# EAGLE board FinalEle2_project v35 (EAGLE 9.7.0)
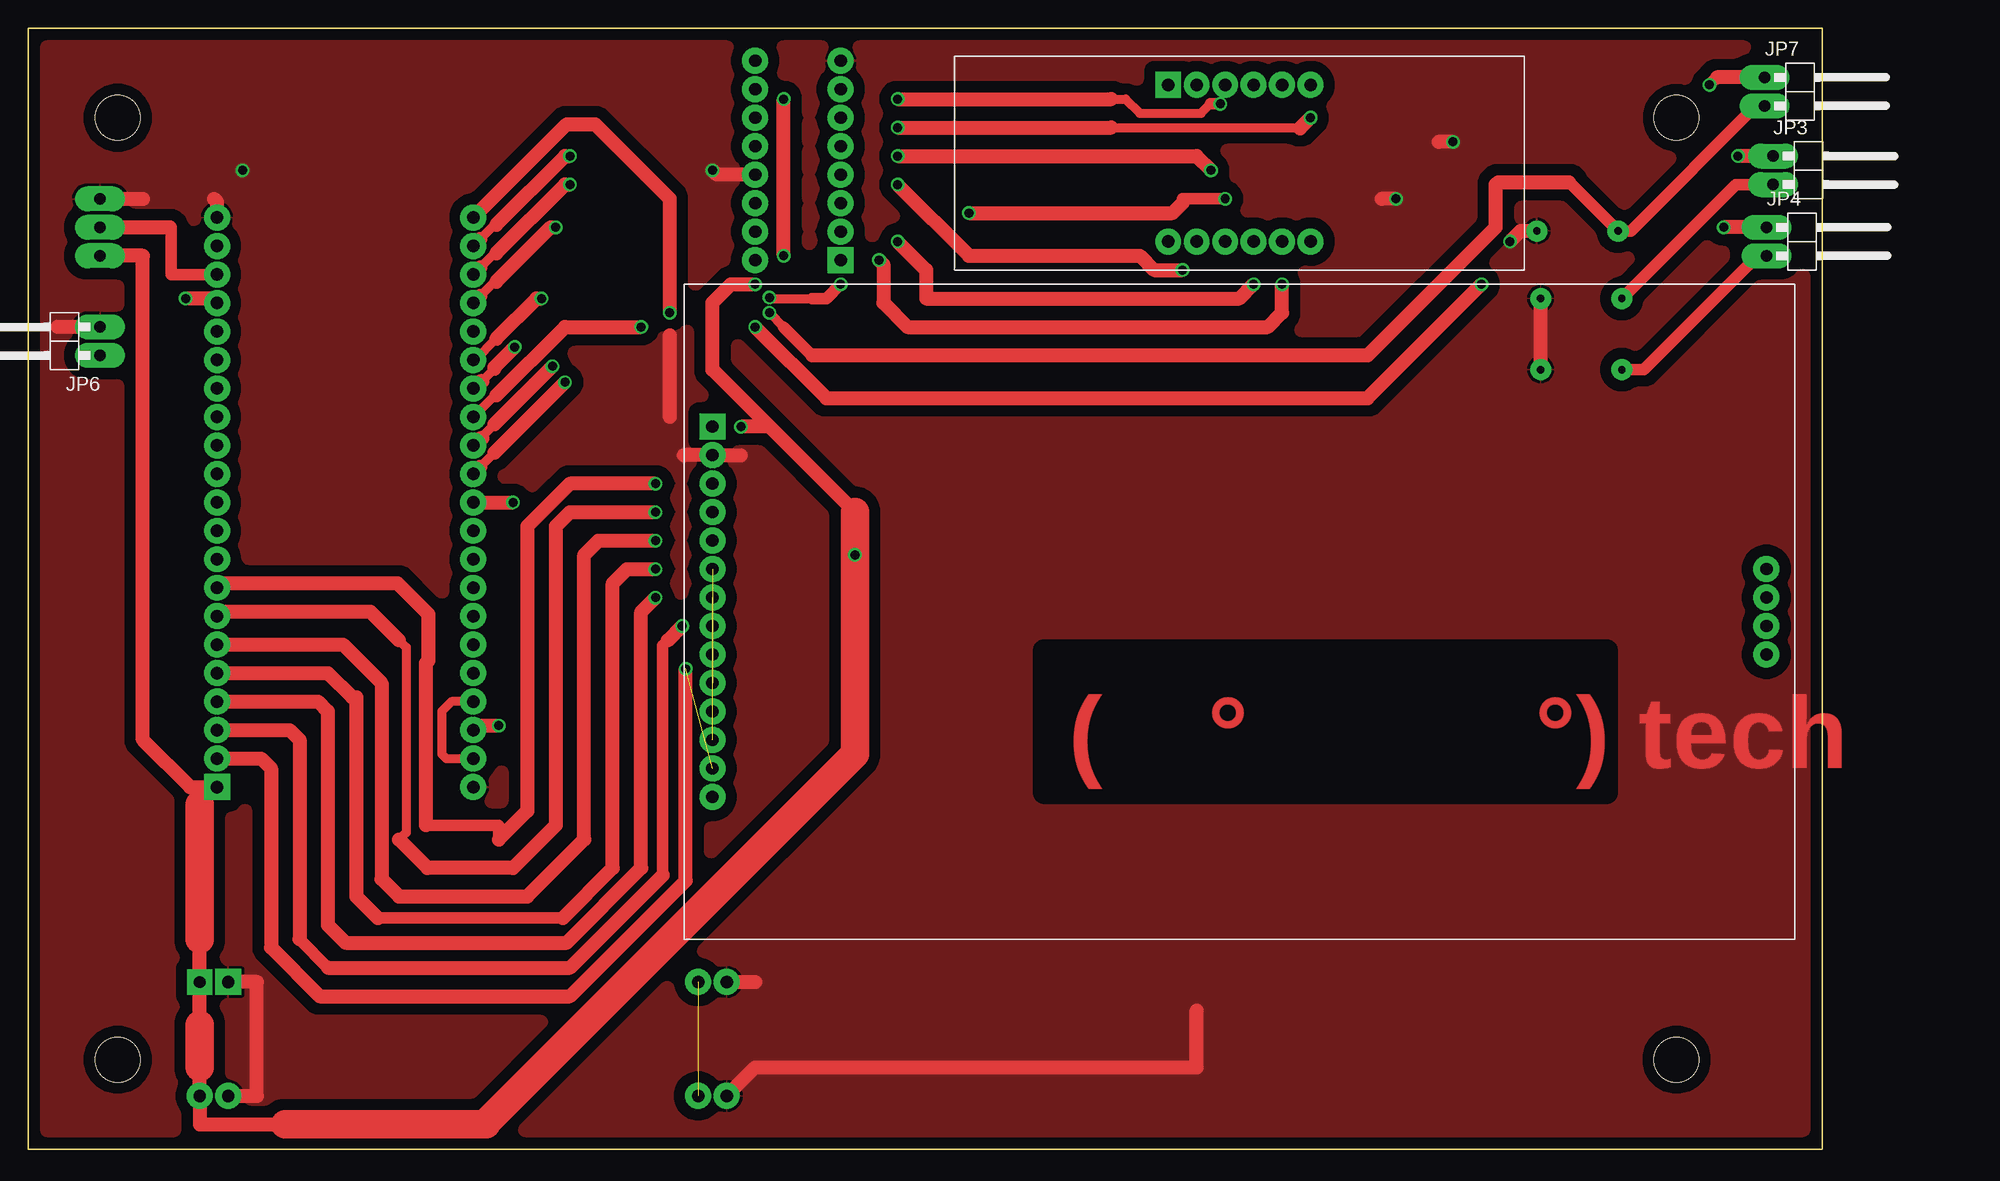
[diagram p0: board, top side]
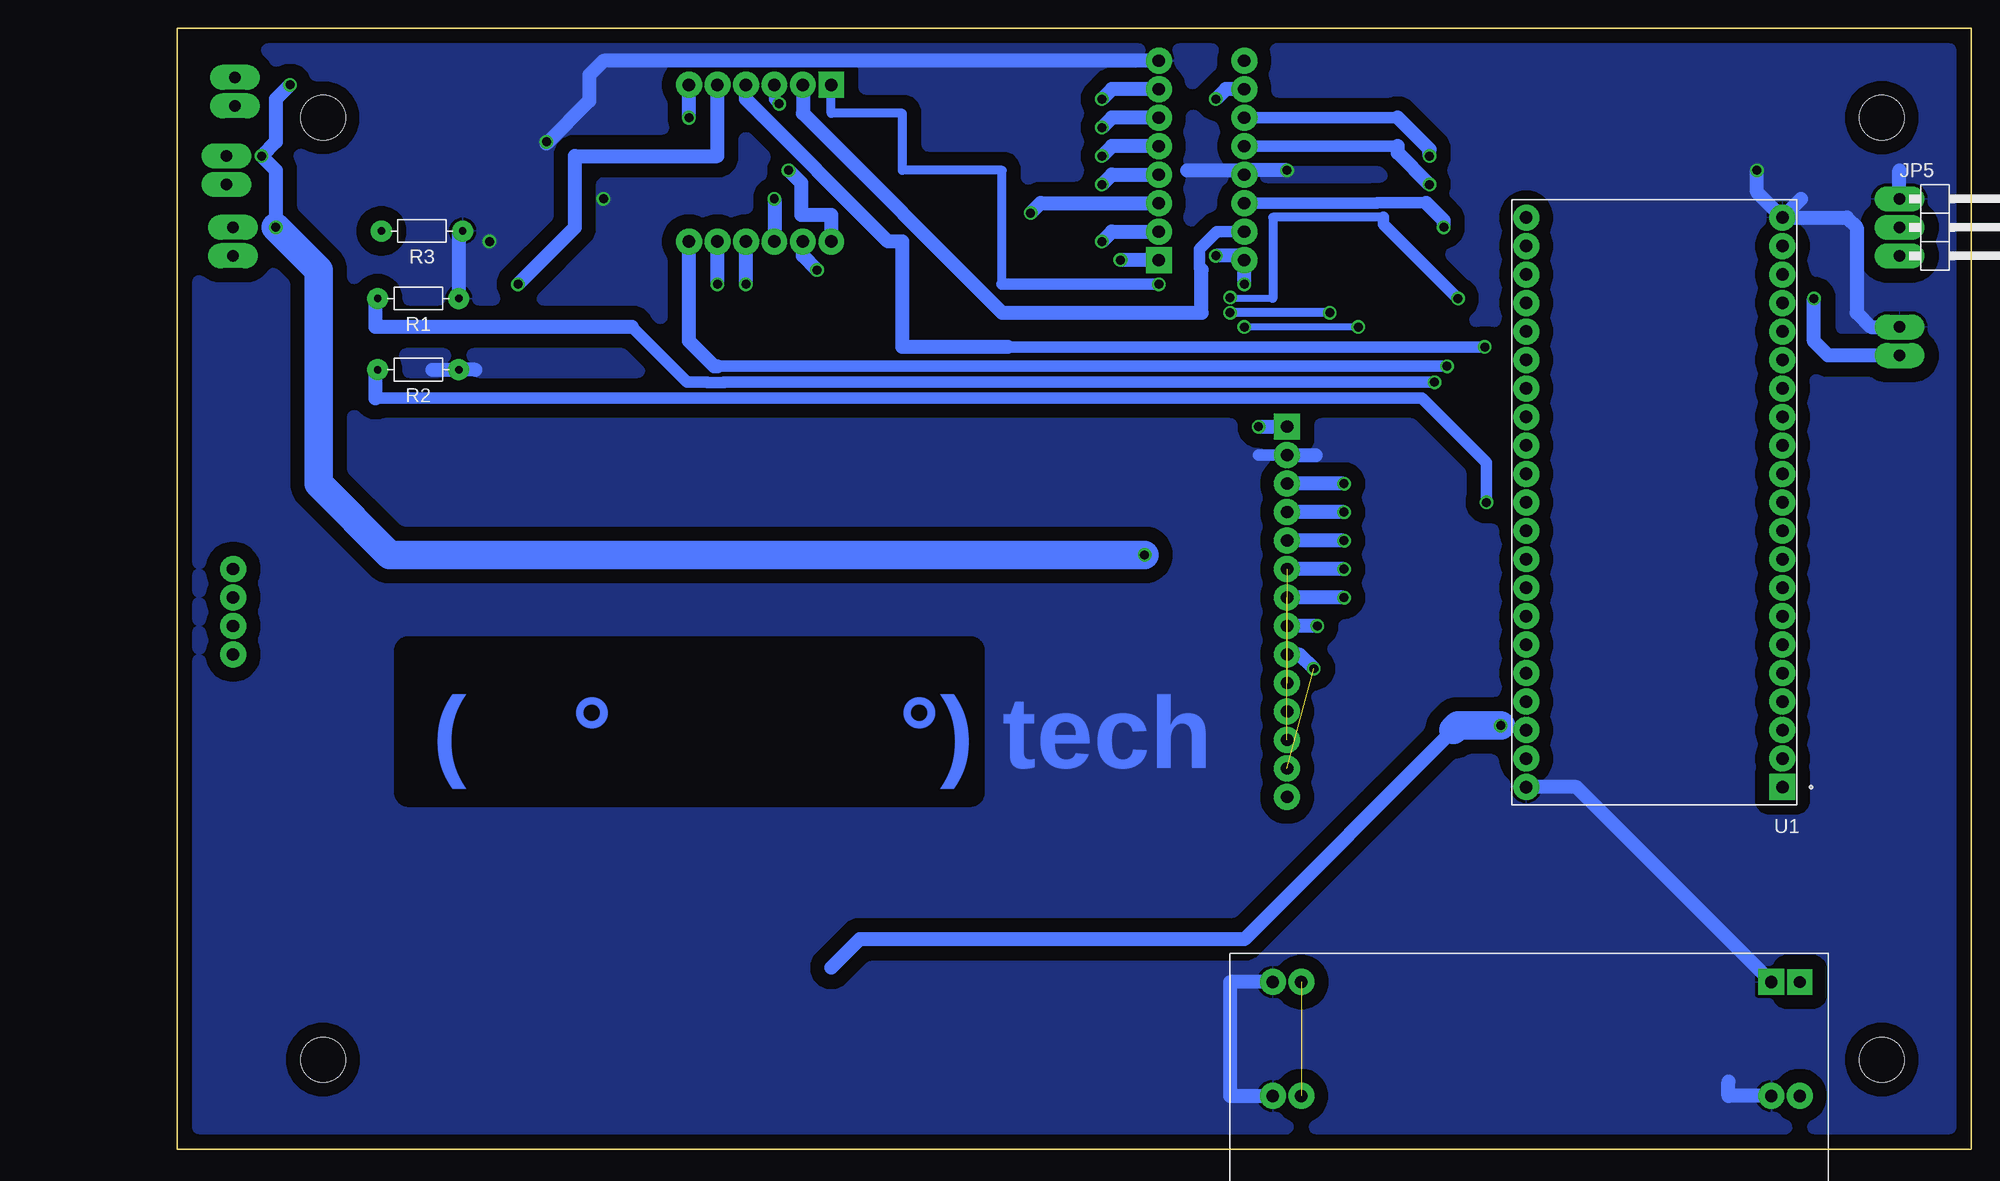
[diagram p1: board, bottom side, seen from below]

Size 160 x 100 mm. Coordinates in mm from the lower left corner, seen from the top.
Outline: 160,0 160,100 0,100 0,0 160,0
Copper layers (1*16): Top / Bottom
Stack-up Default Layer Stack: Top User Defined 0.035mm / Dielectric-1 User Defined 1.5mm / Bottom User Defined 0.035mm
Design rules: minimum copper width 6mil, minimum drill size 0.8mm, copper clearance wire_polygon to wire_polygon 0.3mm, copper clearance wire_polygon to pad_smd 6mil, copper clearance wire_polygon to via 6mil, copper clearance pad_smd to pad_smd 6mil, copper clearance pad_smd to via 6mil, copper clearance via to via 6mil, copper clearance smd to pad (same net) 6mil, copper clearance smd to via (same net) 6mil, copper clearance smd to smd (same net) 6mil, dimension clearance 0mil, via restrict clearance 0mil, restrict clearance 0mil, drill distance 6mil, keepout clearance 0mil
Holes 4 mm at 147,8 147,92 8,92 8,8

## Footprints (pad centres in the part's own frame; a part is rotated, then mirrored left to right if it is on the bottom)
1X02/90 = drill 1.016 long: 1 -1.27,-3.81; 2 1.27,-3.81
1X03/90 = drill 1.016 long: 1 -2.54,-3.81; 2 0,-3.81; 3 2.54,-3.81
RESAD724W46L381D178B = drill 0.66 pad 1.26: 1 -3.62,0; 2 3.62,0
XCVR_ESP32-S2-DEVKITM-1U = drill 1.1 square: J1_1 -11.43,25.4 | drill 1.1: J1_2 -11.43,22.86; J1_3 -11.43,20.32; J1_4 -11.43,17.78; J1_5 -11.43,15.24; J1_6 -11.43,12.7; J1_7 -11.43,10.16; J1_8 -11.43,7.62; J1_9 -11.43,5.08; J1_10 -11.43,2.54; J1_11 -11.43,0; J1_12 -11.43,-2.54; J1_13 -11.43,-5.08; J1_14 -11.43,-7.62; J1_15 -11.43,-10.16; J1_16 -11.43,-12.7; J1_17 -11.43,-15.24; J1_18 -11.43,-17.78; J1_19 -11.43,-20.32; J1_20 -11.43,-22.86; J1_21 -11.43,-25.4; J3_1 11.43,25.4; J3_2 11.43,22.86; J3_3 11.43,20.32; J3_4 11.43,17.78; J3_5 11.43,15.24; J3_6 11.43,12.7; J3_7 11.43,10.16; J3_8 11.43,7.62; J3_9 11.43,5.08; J3_10 11.43,2.54; J3_11 11.43,0; J3_12 11.43,-2.54; J3_13 11.43,-5.08; J3_14 11.43,-7.62; J3_15 11.43,-10.16; J3_16 11.43,-12.7; J3_17 11.43,-15.24; J3_18 11.43,-17.78; J3_19 11.43,-20.32; J3_20 11.43,-22.86; J3_21 11.43,-25.4
3.5TFT = drill 1.1 square: P$1 -10.16,16.51 | drill 1.1: P$2 -10.16,13.97; P$3 -10.16,11.43; P$4 -10.16,8.89; P$5 -10.16,6.35; P$6 -10.16,3.81; P$7 -10.16,1.27; P$8 -10.16,-1.27; P$9 -10.16,-3.81; P$10 -10.16,-6.35; P$11 -10.16,-8.89; P$12 -10.16,-11.43; P$13 -10.16,-13.97; P$14 -10.16,-16.51; P$15 83.82,3.81; P$16 83.82,1.27; P$17 83.82,-1.27; P$18 83.82,-3.81
POWERSUPPLYMODULE = drill 1.1: P$1 -24.13,-1.27; P$2 -21.59,-1.27; P$5 20.32,-1.27; P$6 22.86,-1.27; P$8 20.32,-11.43; P$9 22.86,-11.43 | drill 1.05 square: P$3 -24.13,-11.43 | drill 1.1 square: P$4 -21.59,-11.43
7S-4D = drill 1.1 square: P$1 -6.35,6.35 | drill 1.1: P$2 -3.81,6.35; P$3 -1.27,6.35; P$4 1.27,6.35; P$5 3.81,6.35; P$6 6.35,6.35; P$7 -6.35,-7.62; P$8 -3.81,-7.62; P$9 -1.27,-7.62; P$10 1.27,-7.62; P$11 3.81,-7.62; P$12 6.35,-7.62
74HC595N = drill 1.1 square: P$1 -3.81,8.89 | drill 1.1: P$2 -3.81,6.35; P$3 -3.81,3.81; P$4 -3.81,1.27; P$5 -3.81,-1.27; P$6 -3.81,-3.81; P$7 -3.81,-6.35; P$8 -3.81,-8.89; P$9 3.81,8.89; P$10 3.81,6.35; P$11 3.81,3.81; P$12 3.81,1.27; P$13 3.81,-1.27; P$14 3.81,-3.81; P$15 3.81,-6.35; P$16 3.81,-8.89

## Placement (x,y rotation side)
JP3  PINHD-1X2/90  [1X02/90]  159.42,87.31 270 top
JP4  PINHD-1X2/90  [1X02/90]  158.82,80.96 270 top
JP5  PINHD-1X3/90  [1X03/90]  2.62,82.23 270 bottom
JP6  PINHD-1X2/90  [1X02/90]  2.61,72.07 90 top
JP7  PINHD-1X2/90  [1X02/90]  158.65,94.34 270 top
R1  1k  [RESAD724W46L381D178B]  138.5,75.88 180 bottom
R2  1k  [RESAD724W46L381D178B]  138.5,69.53 180 bottom
R3  1k  [RESAD724W46L381D178B]  138.17,81.9 180 bottom
U1  ESP32-S2-DEVKITM-1U  [XCVR_ESP32-S2-DEVKITM-1U]  28.28,57.7 180 bottom
U$1  3.5TFTWQ  [3.5TFT]  71.19,47.94 0 top
U$2  POWERSUPPLYMODULE  [POWERSUPPLYMODULE]  39.44,3.49 180 bottom
U$4  7S-4D  [7S-4D]  108.02,88.58 0 top
U$7  OIK74HC595N  [74HC595N]  68.65,88.19 180 top

## Library data of the parts
JP3 JP4 JP6 JP7 = Connector; CATEGORY: Headers; DESCRIPTION: Header, Right Angle, 2 Position; MANUFACTURER: Generic; MPN: Generic; OPERATING_TEMPERATURE: Generic; PART_STATUS: Active; PITCH: 0.100" (2.54mm); ROHS_COMPLIANCE: Generic; SERIES: Generic; SUB-CATEGORY: Headers, Male Pins; TYPE: Board to Board or Cable, Unshrouded, Through Hole, Right Angle
JP5 = Connector; CATEGORY: Headers; DESCRIPTION: Header, Right Angle, 3 Position; MANUFACTURER: Generic; MPN: Generic; OPERATING_TEMPERATURE: Generic; PART_STATUS: Active; PITCH: 0.100" (2.54mm); ROHS_COMPLIANCE: Generic; SERIES: Generic; SUB-CATEGORY: Headers, Male Pins; TYPE: Board to Board or Cable, Unshrouded, Through Hole, Right Angle
R1-R3 = Resistor; CATEGORY: Resistor; SUB-CATEGORY: Fixed
U1 = ESP32-S2-DEVKITM-1U; MANUFACTURER: Espressif; PARTREV: 1.0; STANDARD: Manufacturer Recommendations
U$1 = tft 3.5''
U$2 = power supply module
U$4 = 7s 4digit
U$7 = Library

## Nets
0: U1.J1_2 U$1.P$9 U$1.P$13
1: U1.J1_3 U$1.P$8 U$1.P$12
2: U1.J1_4 U$1.P$7 U$1.P$11
3: U1.J1_5 U$1.P$6 U$1.P$10
3V3: JP3.1 JP4.1 JP5.3 JP7.1 U1.J1_1 U$1.P$1 U$2.P$1 U$2.P$3 U$7.P$9 U$7.P$15
4: U1.J1_6 U$1.P$5
5: U1.J1_7 U$1.P$4
6: U1.J1_8 U$1.P$3
7: U1.J1_9
8: U1.J1_10
9: U1.J1_11
10: U1.J1_12
11: U1.J1_13
12: U1.J1_14
13: U1.J1_15
14: U1.J1_16
15: U1.J1_17
16: JP6.1 U1.J1_18
17: JP5.2 U1.J1_19
18: JP7.2 R3.2 U1.J3_21
19: U1.J3_20 U$7.P$14
20: U1.J3_19 U$7.P$13
21: U1.J3_18 U$7.P$11
26: U1.J3_17
33: U1.J3_16 U$4.P$1
34: U1.J3_15 U$4.P$4
35: U1.J3_14 U$4.P$5
36: U1.J3_13 U$4.P$12
37: JP3.2 R1.2 U1.J3_12
38: JP4.2 R2.2 U1.J3_11
39: U1.J3_10
40: U1.J3_9
41: U1.J3_8
42: U1.J3_7
45: U1.J3_2 U1.J3_4
46: U1.J3_3
A: U$4.P$2 U$7.P$10
B: U$4.P$6 U$7.P$6
C: U$4.P$10 U$7.P$2
D: U$4.P$8 U$7.P$4
DESI: U$4.P$9 U$7.P$3
E: U$4.P$7 U$7.P$5
ESP-5V: U1.J1_20
ESP-GND: JP5.1 JP6.2 R1.1 R2.1 R3.1 U1.J1_21 U1.J3_1 U$1.P$2 U$2.P$2 U$2.P$4 U$2.P$6 U$2.P$9 U$7.P$8 U$7.P$12
F: U$4.P$3 U$7.P$7
G: U$4.P$11 U$7.P$1
N$1: U$1.P$14
N$4: U$7.P$16
PS-5V: U$2.P$5 U$2.P$8
RX: U1.J3_5
TX: U1.J3_6

## Tracks (layer width: path | path; a pad name or v marks a point on that pad's centre or on a via)
0  (via drill 0.8)  (1 unrouted)
  Top 1.27: U1.J1_2 20.79,34.84 21.66,33.97 21.66,17.99 26,13.65 48.33,13.65 58.64,23.96 v58.64,42.86
  Bottom 1.27: v58.64,42.86 59.91,44.13 U$1.P$9
1  (via drill 0.8)  (1 unrouted)
  Top 1.016: 24.2,18.73 26.74,16.19 | 56.59,24.45 56.59,44.92 57.07,45.4
  Top 1.27: U1.J1_3 23.33,37.38 24.2,36.51 24.2,18.73 | 57.07,45.4 v58.34,46.67 | 26.74,16.19 48.33,16.19 56.59,24.45
  Bottom 1.27: v58.34,46.67 U$1.P$8
2  (via drill 0.8)  (1 unrouted)
  Top 1.27: U1.J1_4 25.87,39.92 26.74,39.05 26.74,20 28.31,18.43 48.03,18.43 54.68,25.08 54.68,47.94 v55.95,49.21
  Bottom 1.27: v55.95,49.21 U$1.P$7
3  (via drill 0.8 pad 0.5)  (1 unrouted)
  Top 1.016: 31.19,20.64 47.7,20.64
  Top 1.27: U1.J1_5 26.74,42.46 28.88,40.32 29.28,40.32 29.28,22.54 31.19,20.64 | 47.7,20.64 52.14,25.08 52.14,50.48 53.41,51.75 v55.95,51.75
  Bottom 1.27: v55.95,51.75 U$1.P$6
3V3  (via drill 0.8)
  Top 0.813: U1.J1_1 15.31,30.76
  Top 1.016: 150.61,95.61 v149.93,94.93
  Top 1.27: U1.J1_1 14.44,32.3 10.23,36.51 10.23,79.69 JP5.3 | 73.73,56.83 66.11,64.45 | 40.85,2.22 40.85,2.36 | JP3.1 v152.47,88.58 | 66.11,64.45 61.03,69.53 61.03,75.49 62.69,77.15 v64.84,77.15 | 66.11,64.45 v63.57,64.45 | v67.38,79.69 v67.38,93.66 | JP4.1 v151.2,82.23 | JP7.1 150.61,95.61 | 15.31,18.73 U$2.P$3 15.31,11.11 | 15.31,7.3 U$2.P$1 15.31,2.22 22.93,2.22
  Top 2.54: 15.31,7.3 15.31,11.11 | 15.31,18.73 15.31,30.76 | 40.85,2.36 73.73,35.24 v73.73,53.02 73.73,56.83 | 22.93,2.22 40.85,2.22
  Bottom 1.27: v63.57,64.45 U$1.P$1 | v64.84,77.15 U$7.P$9 65.23,79.69 v67.38,79.69 | v67.38,93.66 66.5,94.54 U$7.P$15 | v151.2,82.23 151.2,87.31 v152.47,88.58 151.2,89.85 151.2,93.66 v149.93,94.93
  Bottom 2.54: v151.2,82.23 147.39,78.42 147.39,59.37 141.04,53.02 v73.73,53.02
4  (via drill 0.8)
  Top 1.27: U1.J1_6 28.09,45 31.52,41.57 31.52,24.11 33.09,22.54 44.52,22.54 49.6,27.62 49.6,53.02 50.87,54.29 v55.95,54.29
  Bottom 1.27: v55.95,54.29 U$1.P$5
5  (via drill 0.8)
  Top 0.813: 33.09,45.4 33.73,44.77 33.73,28.26 33.09,27.62
  Top 1.27: U1.J1_7 17.25,47.94 30.55,47.94 33.09,45.4 | 33.09,27.62 35.63,25.08 43.25,25.08 47.06,28.89 47.06,55.56 48.33,56.83 v55.95,56.83
  Bottom 1.27: v55.95,56.83 U$1.P$4
6  (via drill 0.8)
  Top 1.016: 35.48,28.89 41.98,28.89 41.98,27.62
  Top 1.27: U1.J1_8 17.25,50.48 32.94,50.48 35.7,47.72 35.7,43.57 35.48,43.35 35.48,28.89 | 41.98,27.62 44.52,30.16 44.52,55.56 48.33,59.37 v55.95,59.37
  Bottom 1.27: v55.95,59.37 U$1.P$3
16  (via drill 0.8)
  Top 1.27: U1.J1_18 16.45,75.88 v14.04,75.88
  Bottom 1.27: JP6.1 12.77,70.8 14.04,72.07 v14.04,75.88
17
  Top 1.016: 12.64,82.23 12.77,82.23 12.77,78.02 U1.J1_19
  Top 1.27: JP5.2 12.64,82.23
18  (via drill 0.8)
  Top 0.813: v66.11,74.61 67.38,73.34
  Top 1.016: 137.44,86.25 R3.2 142.91,81.9 154.08,93.07 JP7.2 | 69.92,70.8 67.38,73.34
  Top 1.27: U1.J3_21 48.03,91.42 50.57,91.42 57.22,84.77 v57.22,74.61 | 69.92,70.8 119.45,70.8 130.88,82.23 130.88,86.04 131.09,86.25 137.44,86.25
  Bottom 0.813: v57.22,74.61 v66.11,74.61
19  (via drill 0.8)
  Top 0.813: 40.35,81.21 41.61,82.46 41.75,82.46
  Top 1.27: U1.J3_20 40.35,81.21 | v48.33,88.58 47.87,88.58 41.75,82.46
  Bottom 1.016: 51.15,92 U$7.P$14
  Bottom 1.27: v48.33,88.58 48.33,89.18 51.15,92
20  (via drill 0.8)
  Top 0.813: 40.35,78.67 41.61,79.92 41.75,79.92
  Top 1.27: U1.J3_19 40.35,78.67 | v48.33,86.04 47.87,86.04 41.75,79.92
  Bottom 1.016: 51.15,89.46 U$7.P$13
  Bottom 1.27: v48.33,86.04 51.15,88.86 51.15,89.46
21  (via drill 0.8)
  Top 0.813: 40.35,76.13 41.61,77.38 41.75,77.38
  Top 1.27: U1.J3_18 40.35,76.13 | v47.06,82.23 46.6,82.23 41.75,77.38
  Bottom 1.016: U$7.P$11 53.01,84.38 52.97,84.43 48.66,84.43 48.61,84.38
  Bottom 1.27: v47.06,82.23 47.06,82.83 48.61,84.38
33  (via drill 0.8)
  Top 0.813: v66.11,75.97 66.2,75.88 69.92,75.88 | 41.75,72.3 39.85,70.4 U1.J3_16
  Top 1.016: 69.92,75.88 71.19,75.88 v72.46,77.15
  Top 1.27: v45.79,75.88 45.33,75.88 41.75,72.3
  Bottom 0.61: 62.3,75.88 66.02,75.88 v66.11,75.97
  Bottom 0.813: 52.42,83.11 62.3,83.11 62.3,75.88 | 86.43,77.15 86.43,87.31 95.32,87.31 95.32,92.39 101.67,92.39 U$4.P$1
  Bottom 1.016: v45.79,75.88 52.42,82.51 52.42,83.11 | v72.46,77.15 86.43,77.15
34  (via drill 0.8)
  Top 0.813: 40.49,68.51 41.6,69.62
  Top 1.27: U1.J3_15 40.35,68.51 40.49,68.51 | 41.6,69.62 41.6,69.76 v43.4,71.55
  Bottom 1.016: v43.4,71.55 85.91,71.55
  Bottom 1.27: 85.91,71.55 95.32,71.55 95.32,80.96 96.59,80.96 109.29,93.66 U$4.P$4
35  (via drill 0.8)
  Top 0.813: U1.J3_14 41.61,67.22 41.75,67.22
  Top 1.27: v54.68,73.34 47.87,73.34 41.75,67.22 | v64.84,73.34 71.19,66.99 119.45,66.99 v129.61,77.15
  Bottom 0.61: v54.68,73.34 v64.84,73.34
  Bottom 1.27: v129.61,77.15 124.53,82.23 124.53,88.58 111.83,88.58 U$4.P$5
36  (via drill 0.8)
  Top 0.813: 40.49,63.43 40.49,63.57 41.6,64.68
  Top 1.27: U1.J3_13 40.35,63.43 40.49,63.43 | v46.76,69.84 41.6,64.68
  Bottom 1.016: 111.83,69.84 v46.76,69.84
  Bottom 1.27: U$4.P$12 114.37,72.09 112.11,69.84 111.83,69.84
37  (via drill 0.8)
  Top 0.813: 40.35,60.89 41.6,62.14
  Top 1.016: JP3.2 152.28,86.04 R1.2
  Top 1.27: U1.J3_12 40.35,60.89 | 41.6,62.14 v47.88,68.41
  Bottom 1.016: v47.88,68.41 111.21,68.41 111.23,68.39 112.71,68.39 112.73,68.41 114.52,68.41 119.45,73.34
  Bottom 1.27: 119.45,73.34 142.31,73.34 142.31,75.69 R1.2
38  (via drill 0.8)
  Top 1.016: JP4.2 154.25,79.69 144.09,69.53 R2.2
  Top 1.27: U1.J3_11 v43.25,57.7
  Bottom 1.016: v43.25,57.7 43.25,61.24 49,66.99 142.31,66.99
  Bottom 1.27: 142.31,66.99 142.31,69.34 R2.2
45
  Top 0.813: U1.J3_4 37.77,39.92 36.9,39.05 36.9,35.24 37.3,34.84 U1.J3_2
46  (via drill 0.8)
  Top 1.27: U1.J3_3 40.11,37.78 v41.98,37.78
  Bottom 1.27: 46.19,37.38 64.84,18.73 99.13,18.73 101.67,16.19
  Bottom 2.54: v41.98,37.78 45.79,37.78 46.19,37.38
A
  Bottom 1.016: U$7.P$10 67.27,81.84 68.82,80.29 68.82,78.59 68.65,78.42
  Bottom 1.27: 68.65,78.42 68.65,74.61 86.43,74.61 104.21,92.39 U$4.P$2
B  (via drill 0.8)
  Top 0.813: 96.59,91.12 113.34,91.12 113.41,91.05
  Top 1.27: v77.54,91.12 96.59,91.12 | 113.41,91.05 v114.37,92
  Bottom 1.27: v114.37,92 U$4.P$6 | U$7.P$6 76.66,92 v77.54,91.12
C  (via drill 0.8)
  Top 1.27: v109.29,77.15 108.02,75.88 80.08,75.88 80.08,78.42 v77.54,80.96
  Bottom 1.27: v109.29,77.15 U$4.P$10 | U$7.P$2 76.66,81.84 v77.54,80.96
D  (via drill 0.8)
  Top 1.27: v102.94,78.42 100.4,78.42 99.13,79.69 88.97,79.69 83.89,79.69 v77.54,86.04
  Bottom 1.27: v102.94,78.42 104.21,79.69 U$4.P$8 | U$7.P$4 76.66,86.92 v77.54,86.04
DESI  (via drill 0.8)
  Top 1.016: 102.94,84.38 102.94,84.77 v106.75,84.77
  Top 1.27: v83.89,83.5 102.06,83.5 102.94,84.38
  Bottom 1.27: v106.75,84.77 U$4.P$9 | U$7.P$3 83.01,84.38 v83.89,83.5
E  (via drill 0.8)
  Top 1.27: v105.48,87.31 104.21,88.58 v77.54,88.58
  Bottom 1.27: U$4.P$7 101.67,83.35 104.36,83.35 104.36,86.19 v105.48,87.31 | U$7.P$5 76.66,89.46 v77.54,88.58
ESP-GND  (via drill 0.8)
  Top 1.27: R2.1 R1.1 | U$2.P$6 64.84,7.3 104.21,7.3 104.21,12.38 | U$2.P$4 20.39,14.92 20.39,4.76 U$2.P$2 | U$2.P$9 64.84,14.92 | 57.22,72.6 57.22,65.33 | 60.64,61.91 U$1.P$2 | v121.99,84.77 120.72,84.77 | v127.07,89.85 125.8,89.85 | JP5.1 10.23,84.77 | U$7.P$12 61.42,86.92 v61.03,87.31 | R3.1 133.09,81.9 v132.15,80.96 | JP6.2 2.61,73.34 | U$1.P$2 63.57,61.91 | U$1.P$2 58.49,61.91 | U1.J1_21 16.85,84.5 16.58,84.77
  Bottom 1.016: U$1.P$2 63.57,61.91
  Bottom 1.27: U1.J1_21 15.18,84.77 | U1.J1_21 11.1,83.1 10.23,82.23 10.23,74.61 8.96,73.34 JP6.2 | U$2.P$4 35.23,32.3 U1.J3_1 | R3.1 134.88,81.56 R1.1 | U$2.P$9 66.11,14.92 66.11,4.76 U$2.P$6 | U$1.P$2 58.49,61.91 | U$7.P$8 121.99,97.08 123.26,95.81 123.26,93.51 127.07,89.7 v127.07,89.85 | 69.94,87.31 64.84,87.31 U$7.P$12 64.45,87.31 v61.03,87.31 | U1.J1_21 19.12,85.37 v19.12,87.31 | U$2.P$2 21.66,4.76 21.66,6.03 | JP5.1 6.42,87.31 | 133.42,69.53 R2.1 137.23,69.53
  pour Top (isolate 1.016): 0.07,100.01 0.07,-0.32 160.09,-0.32 160.09,100.01
  pour Bottom (isolate 1.27): 0.07,100.01 0.07,-0.32 160.09,-0.32 160.09,100.01
F  (via drill 0.8)
  Top 0.813: 96.59,93.66 97.86,93.66 99.13,92.39 104.6,92.39 105.44,93.23
  Top 1.016: 105.44,93.23 v106.33,93.23
  Top 1.27: v77.54,93.66 96.59,93.66
  Bottom 0.61: 106.75,93.66 U$4.P$3
  Bottom 1.016: v106.33,93.23 106.75,93.66
  Bottom 1.27: U$7.P$7 76.66,94.54 v77.54,93.66
G  (via drill 0.8)
  Top 1.27: v111.83,77.15 111.83,74.61 110.56,73.34 78.42,73.34 76.27,75.49 76.27,78.92 v75.88,79.3
  Bottom 1.27: v111.83,77.15 U$4.P$11 | U$7.P$1 v75.88,79.3
PS-5V  (1 unrouted)

## Text on the board
Top: ( ͡° ͜ʖ ͡°) tech
Bottom: ( ͡° ͜ʖ ͡°) tech